# Allegro board COMPLETE SCHEMATIC V2.brd
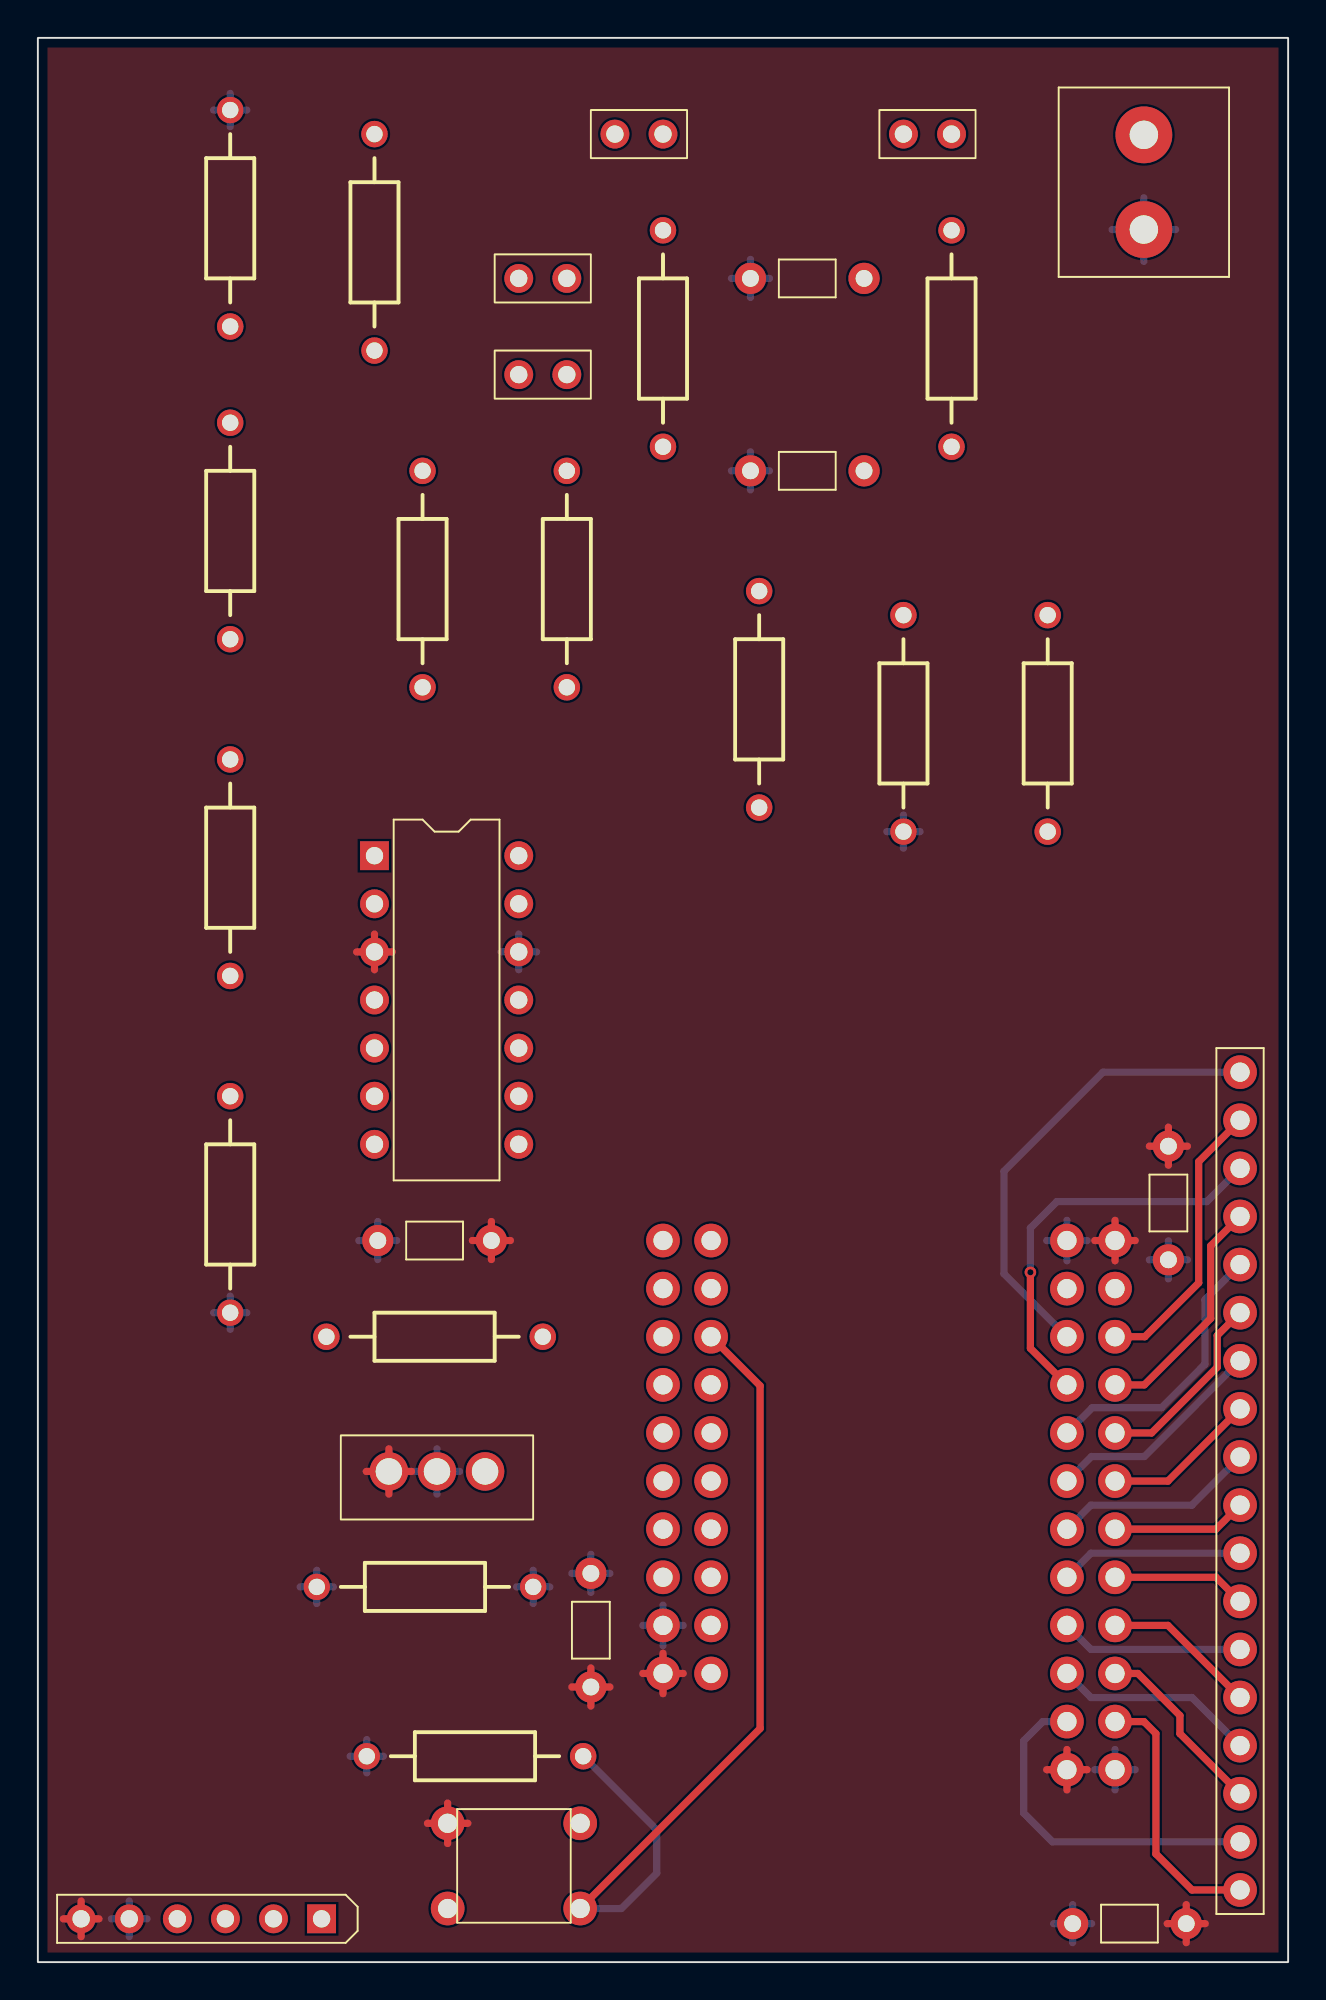
[diagram p0: board, top side]
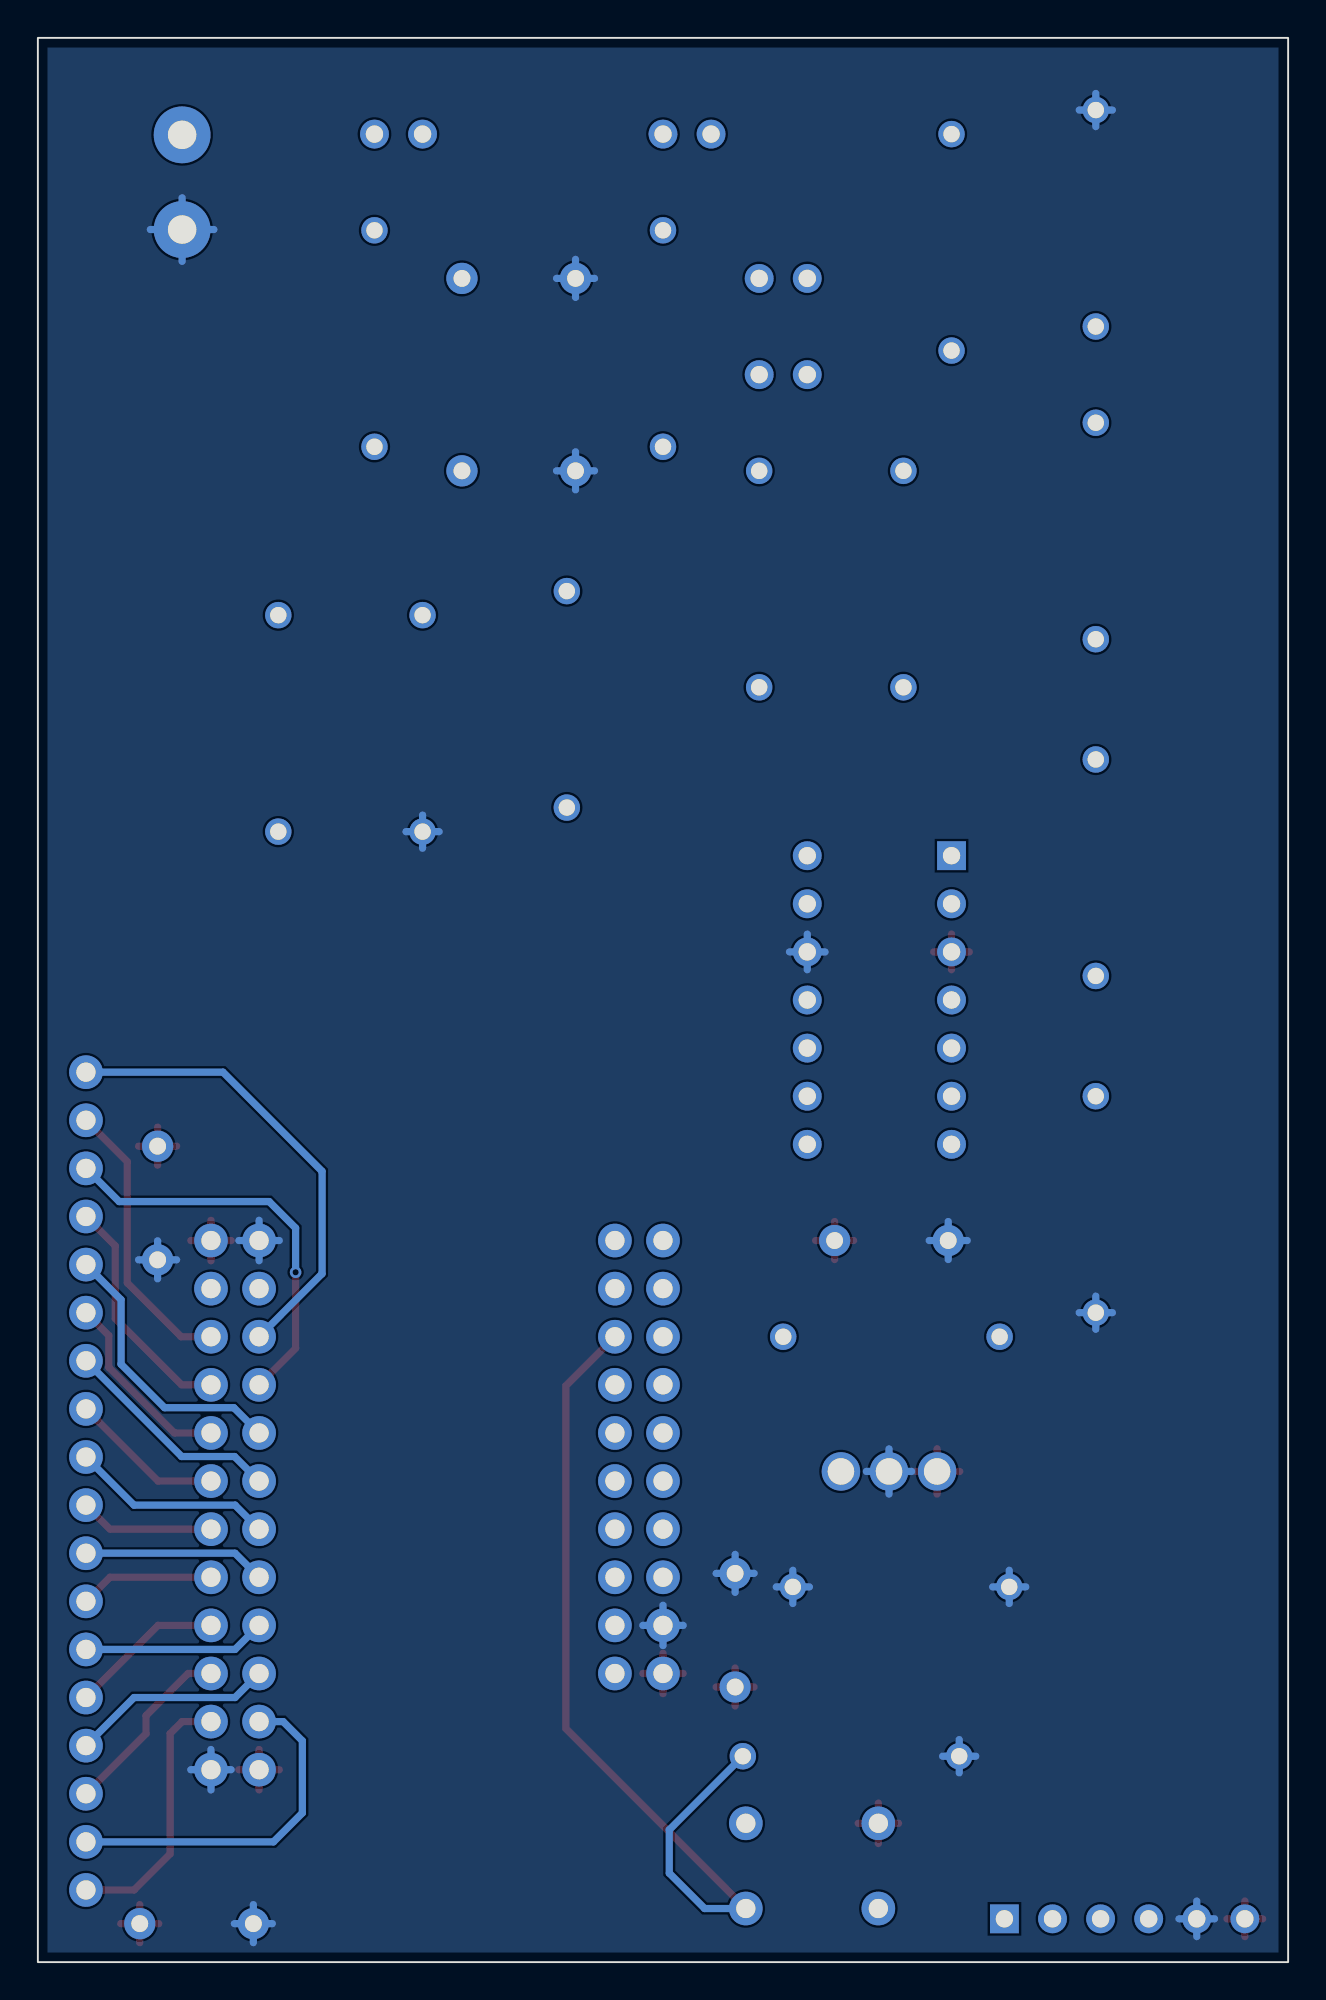
[diagram p1: board, bottom side, seen from below]

Outline 66.04 x 101.6 mm; copper layers: TOP, BOTTOM. Coordinates in mm from the lower left corner of the outline.
Outline path: rectangle 0,0 66.04,101.6

## Placement (name value [footprint] x y rotation side)
BT1  BATTERY  [2POS5MMCON]  58.42 93.98 0 top
C1  0.33uF 50V  [CAP1]  40.64 78.74 180 top
C2  0.1uF 50V  [CAP1]  20.95 38.1 180 top
C3  0.1uF 50V  [CAP1]  40.64 88.9 180 top
C4  0.1uF 50V  [CAP1]  29.21 17.53 90 top
C5  0.1 uF 50V  [CAP1]  59.72 40.08 270 top
C6  0.1uF 50V  [CAP1]  57.66 2.03 180 top
D1  BLU  [JUMPER2]  25.4 83.82 0 top
D2  GRN  [JUMPER2]  25.4 88.9 0 top
D3  1N4733A  [AXRC07]  10.16 86.36 90 top
D4  YEL  [JUMPER2]  30.48 96.52 0 top
D5  RED  [JUMPER2]  45.72 96.52 0 top
D6  1N4001  [AXRC07]  14.73 19.81 0 top
J1  HEADER 6  [SIP6]  14.99 2.29 270 top
J2  HEADER 18  [HEADER_18]  63.5 25.4 0 top
R1  200 1/4W  [AXRC07]  17.78 96.52 270 top
R2  10k 1/4W  [AXRC07]  53.34 71.12 270 top
R3  500 1/4W  [AXRC07]  27.94 78.74 270 top
R4  2k 1/4W  [AXRC07]  10.16 81.28 270 top
R5  500 1/4W  [AXRC07]  20.32 78.74 270 top
R6  1k 1/4W  [AXRC07]  10.16 63.5 270 top
R7  470 1/4W  [AXRC07]  33.02 91.44 270 top
R8  1k 1/4W  [AXRC07]  15.24 33.02 0 top
R9  470 1/4W  [AXRC07]  48.26 91.44 270 top
R10  1k 1/4W  [AXRC07]  38.1 60.96 90 top
R11  12k 1/4W  [AXRC07]  45.72 71.12 270 top
R12  5k 1/4W  [AXRC07]  10.16 45.72 270 top
R13  10k 1/4W  [AXRC07]  28.8 10.87 180 top
SW1  SW PUSHBUTTON-SPST-2  [BUTTON]  25.15 5.08 0 top
U1  LM7895  [TO220AB]  23.62 25.91 0 top
U2  LM339  [DIP14_3]  17.78 58.42 0 top
U3  PSoC4BLE  [PSOC4BLE]  33.02 38.1 0 top

## Library data of the parts
BT1 = BATTERY
C1 C2 C4-C6 = CAP NP
C3 = C_0
D1 = LED_0: User Part Number: ***
D2 D4 D5 = LED_1: User Part Number: ***
D3 = DIODE ZENER_0
D6 = DIODE_0
J1 = HEADER 6_0: User Part Number: ***
J2 = HEADER 18
R1-R13 = R
SW1 = SW PUSHBUTTON-SPST-2
U1 = Linear regulator
U2 = LM339_1: Tolerance: ***; User Part Number: ***
U3 = PSoC4BLE_0

## Footprints (pads in the part's own frame, mm; a bottom-side part is the same pattern mirrored in y, then rotated)
2POS5MMCON
  round 3 hole 1.5: 1(0,2.5) 2(0,-2.5)
AXRC07
  round 1.397 hole 0.864: 1(0,0) 2(11.43,0)
BUTTON
  round 1.778 hole 1.016: 1(-3.5,2.25) 2(-3.5,-2.25) 3(3.5,-2.25) 4(3.5,2.25)
CAP1
  round 1.651 hole 0.889: 1(-3,0) 2(3,0)
DIP14_3
  rect 1.524x1.524 hole 0.914: 1(0,0)
  round 1.524 hole 0.914: 2(0,-2.54) 3(0,-5.08) 4(0,-7.62) 5(0,-10.16) 6(0,-12.7) 7(0,-15.24) 8(7.62,-15.24) 9(7.62,-12.7) 10(7.62,-10.16) 11(7.62,-7.62) 12(7.62,-5.08) 13(7.62,-2.54) 14(7.62,0)
HEADER_18
  round 1.778 hole 1.016: 1(0,21.59) 2(0,19.05) 3(0,16.51) 4(0,13.97) 5(0,11.43) 6(0,8.89) 7(0,6.35) 8(0,3.81) 9(0,1.27) 10(0,-1.27) 11(0,-3.81) 12(0,-6.35) 13(0,-8.89) 14(0,-11.43) 15(0,-13.97) 16(0,-16.51) 17(0,-19.05) 18(0,-21.59)
JUMPER2
  round 1.524 hole 0.914: 1(0,0) 2(2.54,0)
PSOC4BLE
  round 1.778 hole 1.016: 1(2.54,-22.86) 2(0,-22.86) 3(2.54,-20.32) 4(0,-20.32) 5(2.54,-17.78) 6(0,-17.78) 7(2.54,-15.24) 8(0,-15.24) 9(2.54,-12.7) 10(0,-12.7) 11(2.54,-10.16) 12(0,-10.16) 13(2.54,-7.62) 14(0,-7.62) 15(2.54,-5.08) 16(0,-5.08) 17(2.54,-2.54) 18(0,-2.54) 19(2.54,0) 20(0,0) 21(21.336,0) 22(23.876,0) 23(21.336,-2.54) 24(23.876,-2.54) 25(21.336,-5.08) 26(23.876,-5.08) 27(21.336,-7.62) 28(23.876,-7.62) 29(21.336,-10.16) 30(23.876,-10.16) 31(21.336,-12.7) 32(23.876,-12.7) 33(21.336,-15.24) 34(23.876,-15.24) 35(21.336,-17.78) 36(23.876,-17.78) 37(21.336,-20.32) 38(23.876,-20.32) 39(21.336,-22.86) 40(23.876,-22.86) 41(21.336,-25.4) 42(23.876,-25.4) 43(21.336,-27.94) 44(23.876,-27.94)
SIP6
  rect 1.524x1.524 hole 0.914: 1(0,0)
  round 1.524 hole 0.914: 2(0,-2.54) 3(0,-5.08) 4(0,-7.62) 5(0,-10.16) 6(0,-12.7)
TO220AB
  round 2.032 hole 1.397: 1(0,0) 2(-2.54,0) 3(-5.08,0)

## Nets
+VBAT: BT1.1(+) C1.1 C3.1 D1.1 D2.1 D4.1 D5.1 R1.1 R2.1 U1.1(INPUT)
GND: BT1.2(-) C1.2 C2.2 C3.2 C4.2 C5.2 C6.2 D3.2(ANODE) D6.1 D6.2 J1.5(GND) R11.2 R12.2 R13.2 U1.2(GEOUND) U2.12 U3.4(GND1) U3.21(GND2) U3.44(GND3)
+5 V: C2.1 C4.1 C5.1 C6.1 J1.6(VCC) SW1.1 U1.3(OUTPUT) U2.3 U3.2(VDDD) U3.22(VDDA) U3.43(VDDR)
RXD: J1.2(RXD) U3.11(P1.1)
TXD: J1.3(TXD) U3.12(P1.2)
N56194: R3.2 U2.1(OUT)
N56202: R5.2 U2.2(OUT)
N56210: R7.2 U2.14(OUT)
N56218: R9.2 U2.13(OUT)
N56230: D3.1(CATHODE) R1.2 R4.1
N56234: R4.2 R6.1 U2.7(+IN)
N56238: R6.2 R8.1 U2.5(+IN)
N56242: R8.2 R10.1 U2.9(+IN)
N56246: R2.2 R12.1 U2.4(-IN) U2.6(-IN) U2.8(-IN) U2.10(-IN)
N56362: R10.2 R11.1 U2.11(+IN)
N56366: D2.2 R5.1
N56370: D4.2 R7.1
N56374: D5.2 R9.1
N56918: R13.1 SW1.3 U3.15(P0.4)
N57246: J2.18 U3.42(P2.1)
N57250: J2.17 U3.41(P2.0)
N57254: J2.16 U3.40(P2.3)
N57258: J2.15 U3.39(P2.2)
N57262: J2.14 U3.38(P2.5)
N57266: J2.13 U3.37(P2.4)
N57270: J2.12 U3.36(P2.7)
N57274: J2.11 U3.35(P2.6)
N57278: J2.10 U3.34(P5.0)
N57282: J2.9 U3.33(P4.1)
N57286: J2.8 U3.32(P5.1)
N57290: J2.7 U3.31(P4.0)
N57294: J2.6 U3.30(P3.1)
N57298: J2.5 U3.29(P3.0)
N57318: J2.4 U3.28(P3.3)
N57322: J2.3 U3.27(P3.2)
N57332: J2.2 U3.26(P3.5)
N57336: J2.1 U3.25(P3.4)
N561581: D1.2 R3.1

Pads without a net: J1 1 4; SW1 2 4; U3 1 3 5 6 7 8 9 10 13 14 16 17 18 19 20 23 24

## Via types
v1: diameter 0.61, hole 0.33, TOP to BOTTOM, 1 via

## Routing (per net, layer and track width the routed paths; a pad name or vN(x,y) marks a point on that pad's centre or on a via; arc(x,y) is an arc through that point)
GND: length 77
  BOTTOM w0.381: U1.2 22.28,25.91 ; U1.2 19.89,25.91 ; U1.2 21.08,27.1 ; U1.2 21.08,24.71 ; C3.2 37.64,89.9 ; C3.2 37.64,87.9 ; C3.2 38.64,88.9 ; C3.2 36.64,88.9 ; 17.37,9.99 R13.2 ; R13.2 17.37,11.75 ; R13.2 16.5,10.87 ; R13.2 18.25,10.87 ; C1.2 37.64,79.74 ; C1.2 37.64,77.74 ; C1.2 36.64,78.74 ; C1.2 38.64,78.74 ; 59.72,36.08 C5.2 ; C5.2 59.72,38.09 ; C5.2 58.71,37.08 ; C5.2 60.72,37.08 ; 16.95,38.1 C2.2 ; C2.2 18.96,38.1 ; C2.2 17.96,39.1 ; C2.2 17.96,37.1 ; C6.2 55.66,2.03 ; C6.2 53.65,2.03 ; C6.2 54.66,1.03 ; C6.2 54.66,3.04 ; 9.28,34.29 R12.2 ; R12.2 10.16,33.41 ; R12.2 10.16,35.17 ; R12.2 11.04,34.29 ; 25.4,52.4 U2.12 ; U2.12 24.46,53.34 ; U2.12 25.4,54.28 ; U2.12 26.34,53.34 ; 9.28,97.79 D3.2 ; D3.2 10.16,96.91 ; D3.2 11.04,97.79 ; D3.2 10.16,98.67 ; 14.73,18.94 D6.1 ; D6.1 14.73,20.69 ; D6.1 15.61,19.81 ; D6.1 13.86,19.81 ; BT1.2 58.42,93.16 ; BT1.2 56.74,91.48 ; BT1.2 58.42,89.8 ; BT1.2 60.1,91.48 ; 55.83,10.16 U3.44 ; U3.44 56.9,11.23 ; U3.44 57.96,10.16 ; U3.44 56.9,9.09 ; D6.2 26.16,20.69 ; D6.2 27.04,19.81 ; D6.2 26.16,18.94 ; D6.2 25.29,19.81 ; R11.2 46.6,59.69 ; R11.2 45.72,58.81 ; R11.2 45.72,60.57 ; R11.2 44.84,59.69 ; 3.89,2.29 J1.5 ; J1.5 4.83,3.23 ; J1.5 4.83,1.35 ; J1.5 5.77,2.29 ; 29.21,19.52 C4.2 ; C4.2 29.21,21.53 ; C4.2 30.21,20.53 ; C4.2 28.21,20.53 ; U3.21 54.36,39.17 ; U3.21 53.29,38.1 ; U3.21 54.36,37.03 ; U3.21 55.42,38.1 ; U3.4 33.02,18.85 ; U3.4 31.95,17.78 ; U3.4 33.02,16.71 ; U3.4 34.09,17.78
+5 V: length 45.4
  TOP w0.381: U1.3 18.54,27.1 ; U1.3 18.54,24.71 ; U1.3 17.35,25.91 ; U1.3 19.74,25.91 ; U3.22 57.96,38.1 ; U3.22 56.9,37.03 ; U3.22 55.83,38.1 ; U3.22 56.9,39.17 ; 2.29,1.35 J1.6 ; J1.6 1.35,2.29 ; J1.6 3.23,2.29 ; J1.6 2.29,3.23 ; C4.1 29.21,15.53 ; C4.1 28.21,14.53 ; C4.1 30.21,14.53 ; C4.1 29.21,13.52 ; C6.1 60.66,3.04 ; C6.1 61.66,2.03 ; C6.1 59.65,2.03 ; C6.1 60.66,1.03 ; 31.95,15.24 U3.2 ; U3.2 33.02,14.17 ; U3.2 33.02,16.31 ; U3.2 34.09,15.24 ; 54.36,9.09 U3.43 ; U3.43 53.29,10.16 ; U3.43 55.42,10.16 ; U3.43 54.36,11.23 ; 22.95,38.1 C2.1 ; C2.1 24.96,38.1 ; C2.1 23.95,39.1 ; C2.1 23.95,37.1 ; C5.1 60.72,43.08 ; C5.1 59.72,42.08 ; C5.1 58.71,43.08 ; C5.1 59.72,44.09 ; 20.58,7.33 SW1.1 ; SW1.1 22.71,7.33 ; SW1.1 21.65,8.4 ; SW1.1 21.65,6.26 ; U2.3 17.78,54.28 ; U2.3 16.84,53.34 ; U2.3 18.72,53.34 ; U2.3 17.78,52.4
N56918: length 47.8
  TOP w0.381: SW1.3 38.15,12.33 38.15,30.43 U3.15
  BOTTOM w0.381: R13.1 32.69,6.98 32.69,4.7 30.82,2.83 SW1.3
N57246: length 14
  TOP w0.381: J2.18 60.96,3.81 59.05,5.71 59.05,12.06 58.42,12.7 U3.42
N57250: length 18.6
  BOTTOM w0.381: U3.41 53.09,12.7 52.07,11.68 52.07,7.87 53.59,6.35 J2.17
N57254: length 9.8
  TOP w0.381: J2.16 60.33,12.06 60.33,13.02 58.1,15.24 U3.40
N57258: length 10.7
  BOTTOM w0.381: U3.39 55.63,13.97 60.96,13.97 J2.15
N57262: length 8.2
  TOP w0.381: U3.38 59.69,17.78 J2.14
N57266: length 9.7
  BOTTOM w0.381: U3.37 55.63,16.51 J2.13
N57270: length 7.1
  TOP w0.381: J2.12 62.23,20.32 U3.36
N57274: length 9.7
  BOTTOM w0.381: U3.35 55.63,21.59 J2.11
N57278: length 7.1
  TOP w0.381: J2.10 62.23,22.86 U3.34
N57282: length 10.7
  BOTTOM w0.381: J2.9 60.96,24.13 55.63,24.13 U3.33
N57286: length 8.2
  TOP w0.381: U3.32 59.69,25.4 J2.8
N57290: length 11.8
  BOTTOM w0.381: J2.7 58.45,26.7 55.65,26.7 U3.31
N57294: length 10.2
  TOP w0.381: U3.30 58.83,27.94 62.29,31.41 62.29,33.08 J2.6
N57298: length 14.8
  BOTTOM w0.381: J2.5 61.65,34.98 61.65,31.57 59.35,29.27 55.69,29.27 U3.29
N57318: length 12.5
  TOP w0.381: J2.4 61.95,37.82 61.95,33.99 58.45,30.48 U3.28
N57322: length 21.5
  TOP w0.381: v1(52.43,36.42) 52.43,32.41 U3.27
  BOTTOM w0.381: v1(52.43,36.42) 52.43,38.76 53.82,40.16 61.75,40.16 J2.3
N57332: length 15.1
  TOP w0.381: U3.26 58.47,33.02 61.32,35.86 61.32,42.27 J2.2
N57336: length 24.8
  BOTTOM w0.381: J2.1 56.26,46.99 51.03,41.76 51.03,36.35 U3.25

## Copper pours and planes (outline as drawn; the poured copper is in the pictures)
GND on BOTTOM: 0.51,0.51 0.51,101.09 65.53,101.09 65.53,0.51
+5 V on TOP: 0.51,0.51 0.51,101.09 65.53,101.09 65.53,0.51
